# Altium PCB PCB1_HUY.PcbDoc (part 4 of 4)
Units mm, origin at the board's own origin, x right, y up, seen from the top; angles counter-clockwise.
Board outline 93 x 90.05 mm, 2 copper layers (Top Layer, Bottom Layer); 361 components, 379 nets, 1489 pads, 0 vias.
Unrouted connection lines stored in the file: 824.
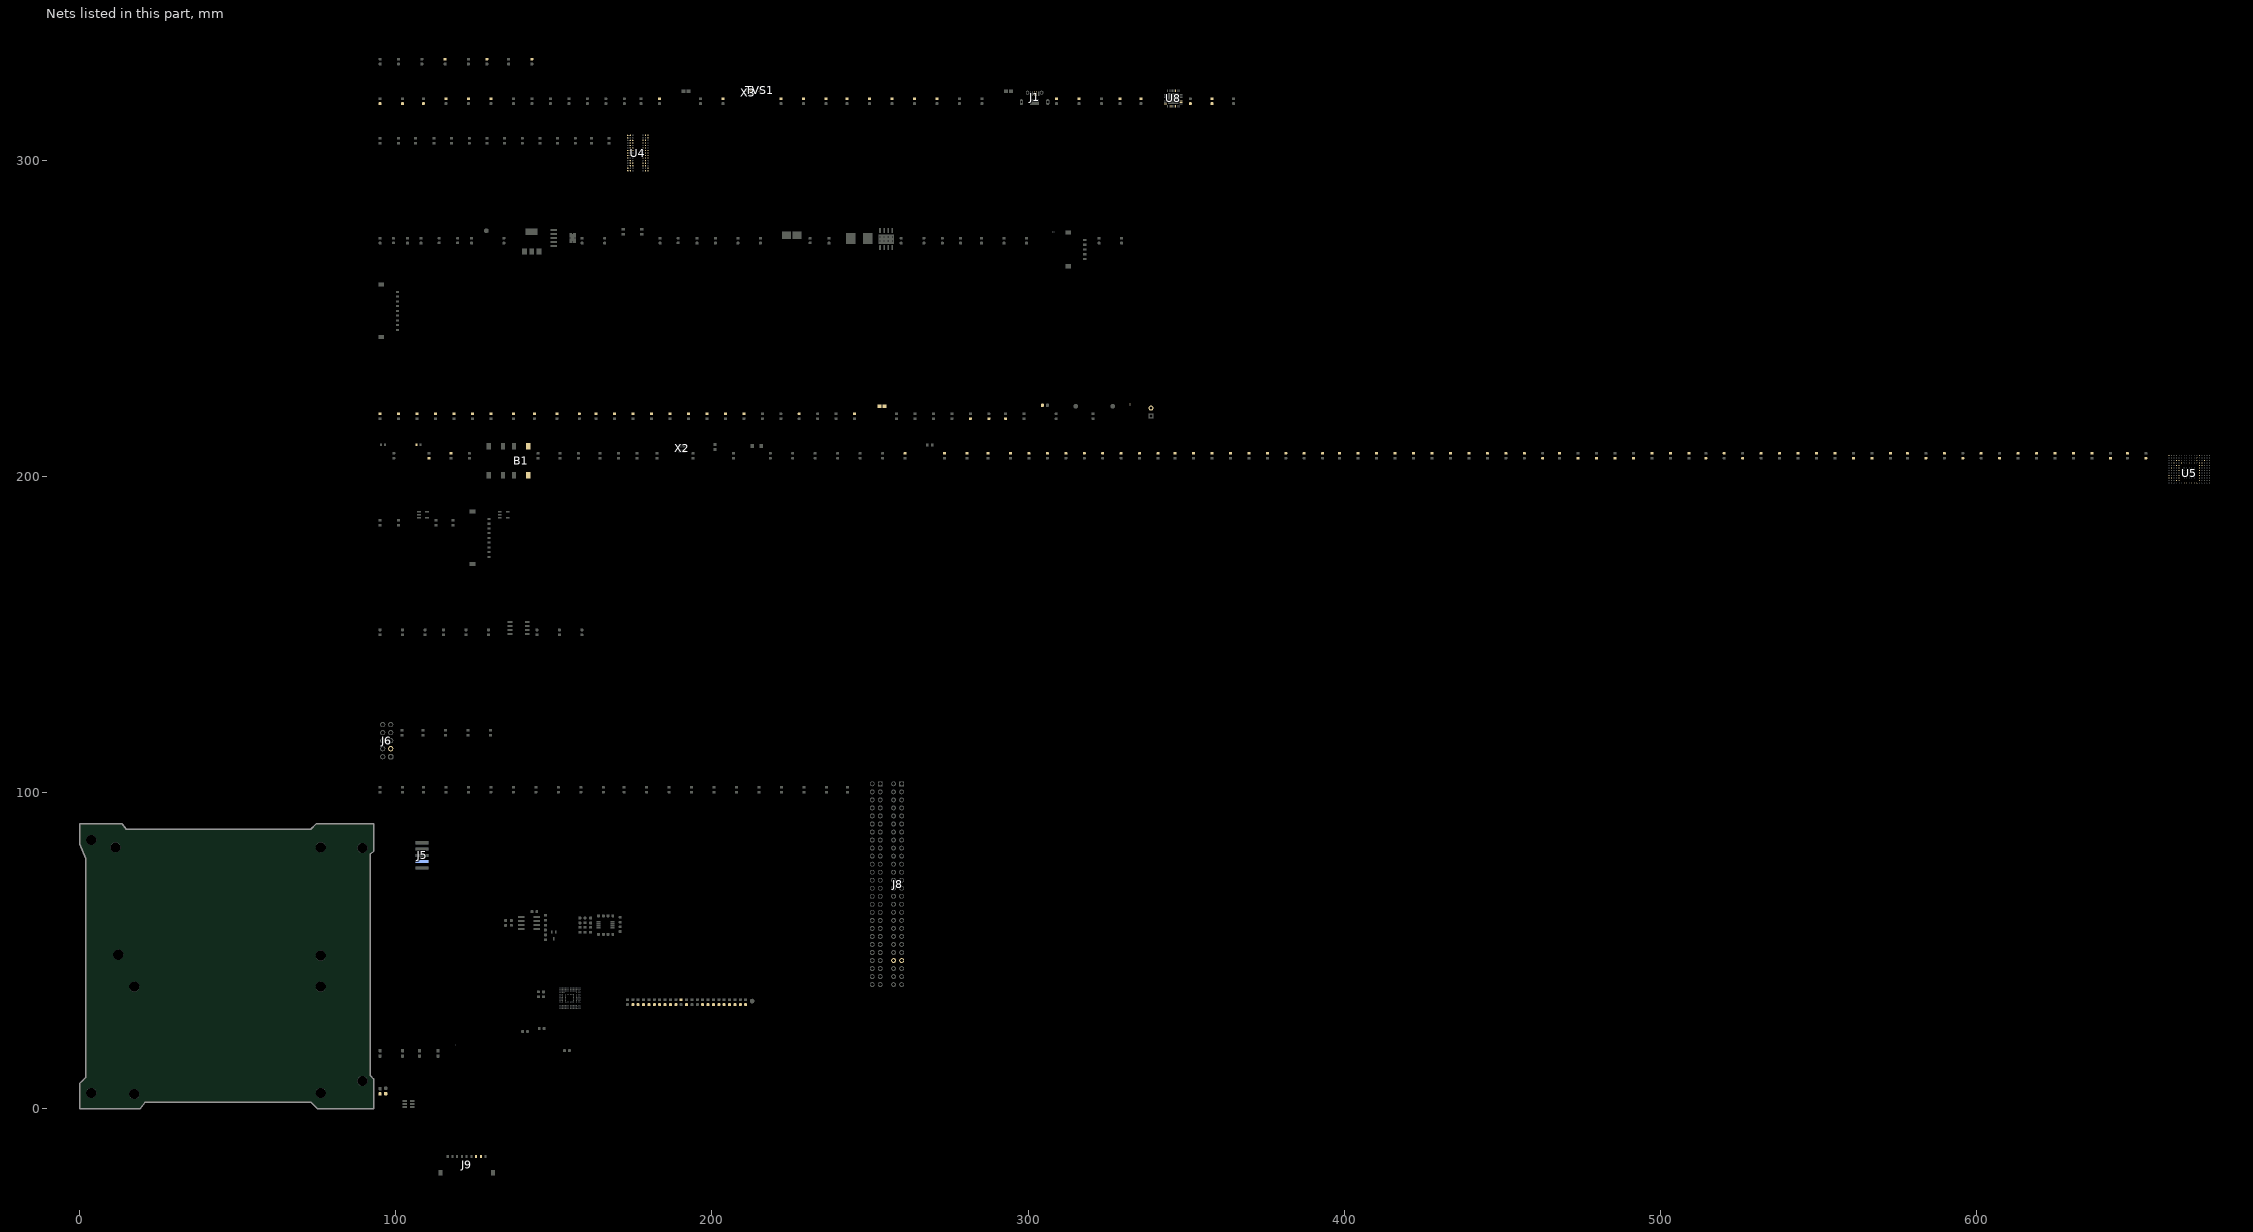
[diagram p3: the nets of this part, all layers, seen from the top]

## Nets (pads, with @x,y where several pads share a name; then routed paths per layer and width w, separated by ;. In a path a pad name is that pad's centre, name@x,y a point inside that pad or via, vN(x,y) a via of type N, cw(c..) or ccw(c..) an arc to the next point about the centre after c; other vN are vias at no path point) (continued)
NetSB19_2: SB19.2 U5.B1
OSC_24M: R134.2 X3.4
OSC_25M: R94.2 X2.3
QSPI_BK1_IO0: R96.2
QSPI_BK1_IO1: R97.2
QSPI_BK1_IO2: R95.2
QSPI_BK1_IO3: R93.2
QSPI_BK1_NCS: R49.1
QSPI_BK2_IO0: R65.1
QSPI_BK2_IO1: R66.1
QSPI_BK2_IO2: R55.1
QSPI_BK2_IO3: R60.1
QSPI_CLK: R98.2
REFSEL0: R137.2 R140.1 U8.8
REFSEL1: R138.2 R141.1 U8.11
REFSEL2: R139.2 R142.1 U8.14
RESET#: B1.3 B1.4 C28.2 J5.7 J6.3 R19.2 R136.2 R199.2 U5.K1 U6.1 U8.27
SDIO1_CK: R20.1 U5.C12
SDIO1_CMD: R18.1 R21.1 U5.D12
SDIO1_D0: R1.1 R9.1 U5.E13
SDIO1_D1: R2.1 R10.1 U5.E14
SDIO1_D2: R3.1 R11.1 U5.A13
SDIO1_D3: R4.1 R12.1 U5.B13
SDIO1_D4: R5.1 R13.1 U5.D5
SDIO1_D5: R6.1 R14.1 U5.D4
SDIO1_D6: R7.1 R15.1 U5.F14
SDIO1_D7: R8.1 R16.1 U5.F13
SDRAM_A0: R87.2 U4.G8
SDRAM_A1: R88.2 U4.G9
SDRAM_A2: R89.2 U4.F7
SDRAM_A3: R90.2 U4.F3
SDRAM_A4: R91.2 U4.G1
SDRAM_A5: R92.2 U4.G2
SDRAM_A6: R100.2 U4.G3
SDRAM_A7: R101.2 U4.H1
SDRAM_A8: R102.2 U4.H2
SDRAM_A9: R105.2 U4.J3
SDRAM_A10: R38.1 U4.G7
SDRAM_A11: R41.1 U4.H9
SDRAM_BA0: R45.1 U4.J7
SDRAM_BA1: R47.1 U4.H8
SDRAM_D0: R59.2 U4.R8
SDRAM_D1: R61.2 U4.N7
SDRAM_D2: R37.2 U4.R9
SDRAM_D3: R40.2 U4.N8
SDRAM_D4: R68.2 U4.P9
SDRAM_D5: R70.2 U4.M8
SDRAM_D6: R72.2 U4.M7
SDRAM_D7: R75.2 U4.L8
SDRAM_D8: R77.2 U4.L2
SDRAM_D9: R79.2 U4.M3
SDRAM_D10: R81.2 U4.M2
SDRAM_D11: R83.2 U4.P1
SDRAM_D12: R85.2 U4.N2
SDRAM_D13: R52.2 U4.R1
SDRAM_D14: R54.2 U4.N3
SDRAM_D15: R57.2 U4.R2
SDRAM_D16: R73.2 U4.E8
SDRAM_D17: R74.2 U4.D7
SDRAM_D18: R76.2 U4.D8
SDRAM_D19: R78.2 U4.B9
SDRAM_D20: R80.2 U4.C8
SDRAM_D21: R82.2 U4.A9
SDRAM_D22: R84.2 U4.C7
SDRAM_D23: R86.2 U4.A8
SDRAM_D24: R39.2 U4.A2
SDRAM_D25: R42.2 U4.C3
SDRAM_D26: R43.2 U4.A1
SDRAM_D27: R44.2 U4.C2
SDRAM_D28: R50.2 U4.B1
SDRAM_D29: R51.2 U4.D2
SDRAM_D30: R56.2 U4.D3
SDRAM_D31: R58.2 U4.E2
SDRAM_NBL0: R63.2 U4.K9
SDRAM_NBL1: R64.2 U4.K1
SDRAM_NBL2: R46.2 U4.F8
SDRAM_NBL3: R48.2 U4.F2
SDRAM_SDCKE1: R71.1 U4.J2
SDRAM_SDCLK: R53.1 U4.J1
SDRAM_SDNCAS: R62.1 U4.K7
SDRAM_SDNE1: R69.1 U4.J8
SDRAM_SDNRAS: R99.2 U4.J9
SDRAM_SDNWE: R67.1 U4.K8
ULPI_CK: R123.2 U5.T3
ULPI_D0: R133.2 U5.U2
ULPI_D1: R132.2 U5.U5
ULPI_D2: R131.2 U5.T5
ULPI_D3: R130.2 U5.P11
ULPI_D4: R129.2 U5.P12
ULPI_D5: R128.2 U5.T14
ULPI_D6: R127.2 U5.U14
ULPI_D7: R126.2 U5.A5
ULPI_DIR: R121.2 U5.F4
ULPI_NXT: R120.2 U5.M4
ULPI_STP: R122.2 U5.L2
USB_CON_N: J9.8
USB_CON_P: J9.7 R118.2
USB_HS_N: J1.2 R119.1 TVS1.A2 U8.18
USB_HS_P: J1.3 R118.1 TVS1.A1 U8.19
VBAT_BUS: J8.45 J8.46
VBUS: U5.D15
VDD_MCU: C83.2 C84.2 C85.2 C86.2 C87.2 C88.2 C89.2 C90.2 C91.2 C92.2 C93.1 C94.2 C95.2 C96.2 C97.2 C98.2 C99.2 C100.2 C101.2 C102.2 C103.2 FB3.2 FB4.1 J10.2 SB16.1 SB17.1 SB18.2 U5.E6 U5.E9 U5.E11 U5.F5 U5.G5 U5.G13 U5.H5 U5.H13 U5.J13 U5.K5 U5.K13 U5.L5 U5.L13 U5.M5 U5.M13 U5.N7 U5.N8 U5.N10 U5.N11 U5.N12
VDD_SDC: C70.1 C71.1 C72.1 L2.1 SB8.2 SB9.1 SB10.1 SB11.1 SB15.1 U5.G2
VDDA: C80.2 C81.1 FB4.2 R205.2 U5.L1
WAKEUP: R115.1 R201.2 U5.E3
WD_DONE: R202.2 U5.U4
pads on no net: C23.2 J1.4 J2.10 J2.11 J3.3 J3.4 J3.8 J3.9 J3.10 J3.11 J4.3 J4.6 J4.7 J6.10 J7.02 J7.04 J7.07 J7.16 J7.17 J7.18 J7.20 J7.22 J7.24 J7.25 J7.26 J7.27 J7.28 J7.29 J7.30 J7.31 J7.32 J7.33 J7.34 J7.35 J7.36 J7.37 J7.45 J7.46 J8.01 J8.02 J8.03 J8.04 J8.05 J8.06 J8.07 J8.08 J8.09 J8.10 J8.11 J8.12 J8.13 J8.14 J8.15 J8.16 J8.17 J8.18 J8.19 J8.20 J8.21 J8.22 J8.23 J8.24 J8.33 J8.34 J8.35 J8.36 J8.37 J8.38 J8.39 J8.40 J8.41 J8.42 J8.43 J8.44 J8.49 J8.50 J8.51 J8.52 J9.10 J9.11 R107.2 U1.A1 U1.A2 U1.A7 U1.A8 U1.A9 U1.A10 U1.A11 U1.A12 U1.A13 U1.A14 U1.B1 U1.B7 U1.B8 U1.B9 U1.B10 U1.B11 U1.B12 U1.B13 U1.B14 U1.C1 U1.C3 U1.C5 U1.C7 U1.C8 U1.C9 U1.C10 U1.C11 U1.C12 U1.C13 U1.C14 U1.D1 U1.D2 U1.D3 U1.D4 U1.D12 U1.D13 U1.D14 U1.E1 U1.E2 U1.E3 U1.E5 U1.E8 U1.E9 U1.E10 U1.E12 U1.E13 U1.E14 U1.F1 U1.F2 U1.F3 U1.F10 U1.F12 U1.F13 U1.F14 U1.G1 U1.G2 U1.G3 U1.G10 U1.G12 U1.G13 U1.G14 U1.H1 U1.H2 U1.H3 U1.H12 U1.H13 U1.H14 U1.J1 U1.J2 U1.J3 U1.J12 U1.J13 U1.J14 U1.K1 U1.K2 U1.K3 U1.K6 U1.K7 U1.K10 U1.K12 U1.K13 U1.K14 U1.L1 U1.L2 U1.L3 U1.L12 U1.L13 U1.L14 U1.M1 U1.M2 U1.M3 U1.M7 U1.M8 U1.M9 U1.M10 U1.M11 U1.M12 U1.M13 U1.M14 U1.N1 U1.N3 U1.N6 U1.N7 U1.N8 U1.N9 U1.N10 U1.N11 U1.N12 U1.N13 U1.N14 U1.P1 U1.P2 U1.P7 U1.P8 U1.P9 U1.P10 U1.P11 U1.P12 U1.P13 U1.P14 U4.E3 U4.E7 U4.H3 U4.H7 U4.K2 U4.K3 U5.A8 U5.A11 U5.A12 U5.B5 U5.B7 U5.B8 U5.B9 U5.B11 U5.C3 U5.C5 U5.C7 U5.C8 U5.C9 U5.C11 U5.D1 U5.D7 U5.D14 U5.E4 U5.E5 U5.F16 U5.H1 U5.H2 U5.H3 U5.H15 U5.H16 U5.H17 U5.J1 U5.J14 U5.J15 U5.K16 U5.K17 U5.L16 U5.L17 U5.M3 U5.M16 U5.M17 U5.P3 U5.P5 U5.R1 U5.R2 U5.R6 U5.R15 U5.T1 U5.T2 U5.T15 U5.U3 U5.U15 U8.12 U8.15 U8.16 U8.17 U8.25 U14.2 U14.3 U14.5 U14.10 U14.11 U14.12 U14.13 U14.14 U14.15 U14.16 U14.17 U19.7 U19.8 U19.9 U19.10

## Keep-outs
Keep-Out Layer:
  lines w0.5: 0,90.05 0,83.725 1.9,79.125 1.9,9.825 0,7.925 0,0 19.2,0 20.676,2.007 73.254,2.007 75.26,0 93.001,0.002 93.001,9.409 91.897,10.513 91.897,80.448 92.989,81.356 93,90.05

## Text inside footprints (layer, text, board x,y; h text height)
J4: Top Overlay "REFDES" at 318.535,269.532 h1.27 r90; Top Overlay "RefDes" at 318.535,269.85 h1.27 r90; Mechanical 13 "RefDes2" at 318.535,269.532 h1.27 r90
J9: Top Overlay "REFDES" at 124.649,-14.453 h1.27 r180; Top Overlay "RefDes" at 124.332,-14.453 h1.27 r180; Mechanical 13 "RefDes2" at 124.649,-14.453 h1.27 r180
U4: Bottom Overlay "9" at 179.146,309.448 h1.27 r270; Bottom Overlay "1" at 172.746,309.448 h1.27 r270; Bottom Overlay "R" at 171.894,296.025 h1.27; Bottom Overlay "A" at 171.894,307.225 h1.27; Top Overlay "REFDES" at 174.358,301.625 h1.27; Top Overlay "RefDes" at 174.676,301.625 h1.27; Top Overlay "9" at 180.416,309.448 h1.27 r90; Top Overlay "1" at 174.016,309.448 h1.27 r90; Top Overlay "R" at 171.26,296.025 h1.27; Top Overlay "A" at 171.26,307.225 h1.27; Mechanical 13 "RefDes2" at 174.358,301.625 h1.27; Mechanical 13 "9" at 180.416,309.448 h1.27 r90; Mechanical 13 "1" at 174.016,309.448 h1.27 r90; Mechanical 13 "R" at 171.26,296.025 h1.27; Mechanical 13 "A" at 171.26,307.225 h1.27
U5: Bottom Overlay "17" at 672.998,208.75 h1.27 r270; Bottom Overlay "1" at 660.198,208.75 h1.27 r270; Bottom Overlay "U" at 659.524,194.006 h1.27; Bottom Overlay "A" at 659.524,206.806 h1.27; Top Overlay "REFDES" at 665.01,200.406 h1.27; Top Overlay "RefDes" at 665.328,200.406 h1.27; Top Overlay "17" at 674.268,208.75 h1.27 r90; Top Overlay "1" at 661.468,208.75 h1.27 r90; Top Overlay "U" at 658.889,194.006 h1.27; Top Overlay "A" at 658.889,206.806 h1.27; Mechanical 13 "RefDes2" at 665.01,200.406 h1.27; Mechanical 13 "17" at 674.268,208.75 h1.27 r90; Mechanical 13 "1" at 661.468,208.75 h1.27 r90; Mechanical 13 "U" at 658.889,194.006 h1.27; Mechanical 13 "A" at 658.889,206.806 h1.27